# Altium PCB treehopper-micro.PcbDoc
Units mm, origin at the board's own origin, x right, y up, seen from the top; angles counter-clockwise.
Board outline 9.65 x 25.4 mm, 2 copper layers (Top Layer, Bottom Layer), stack 0.871 mm thick; 14 components, 21 nets, 79 pads, 34 vias.
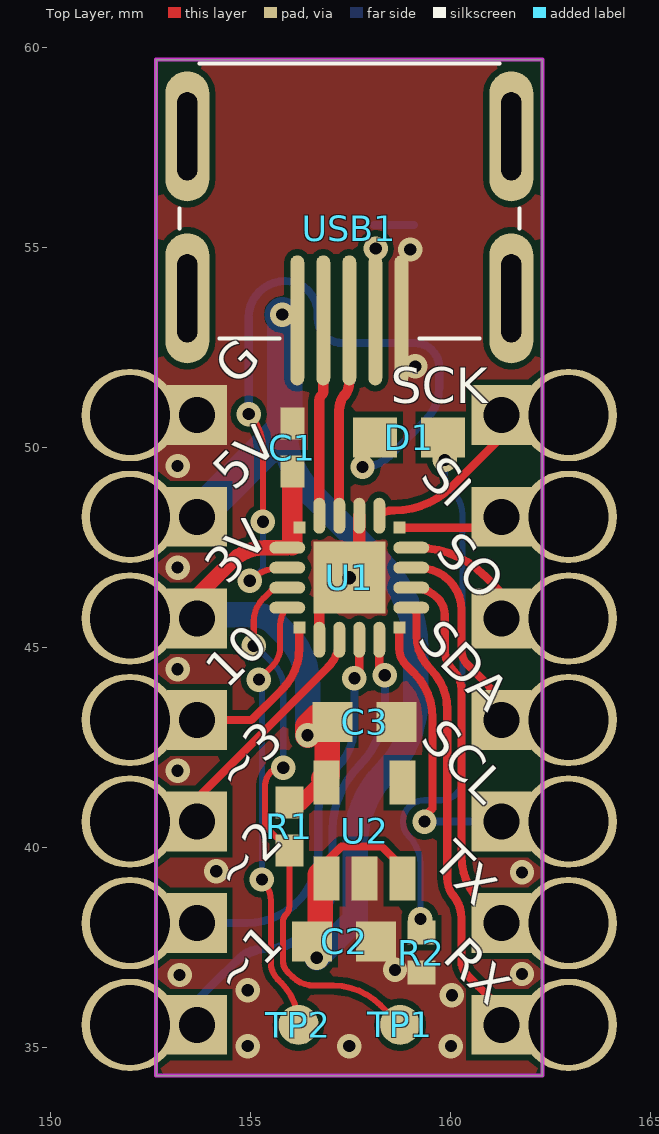
[diagram p0: Top Layer view]
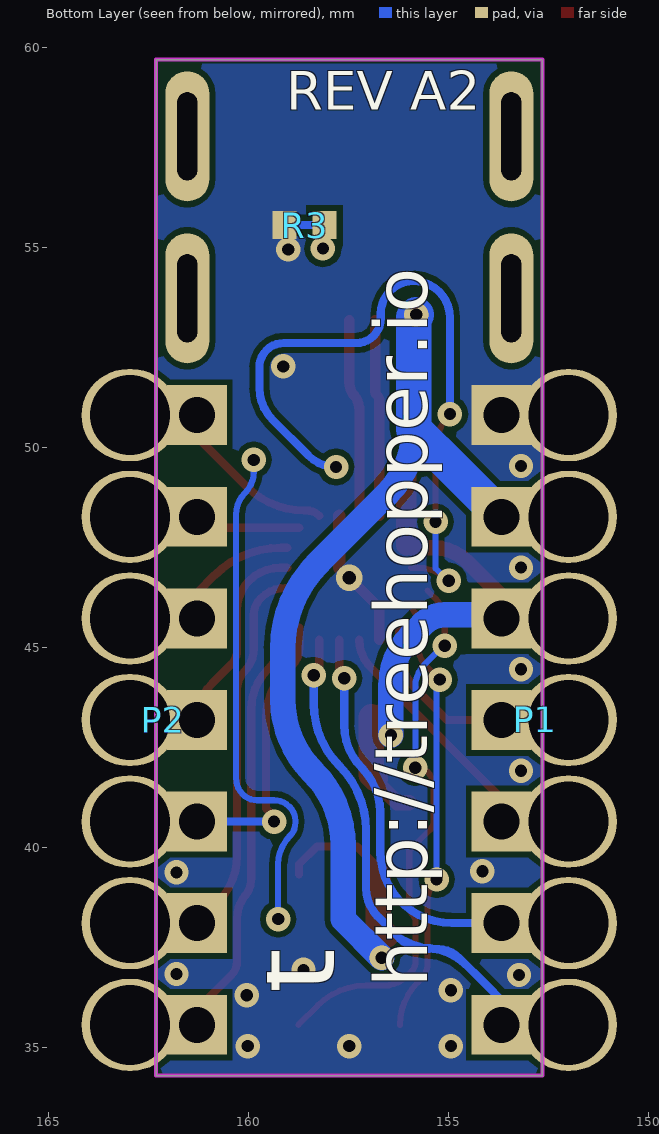
[diagram p1: Bottom Layer view, seen from below]
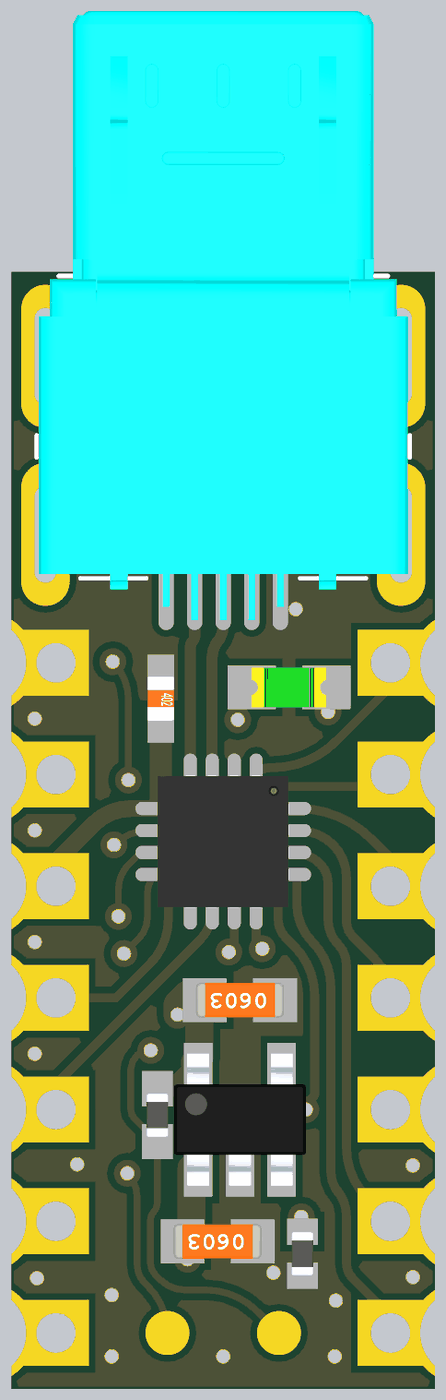
[diagram p2: 3D render of the assembled board from above, using the file's embedded part models]

## Layer stack, top to bottom
Top Solder: solder mask 0.0102, Solder Resist, Dk 3.5
Top Layer: signal copper 0.0356
Dielectric 1: dielectric 0.8, FR-4, Dk 4.8
Bottom Layer: signal copper 0.0356
Bottom Solder: solder mask 0.0102, Solder Resist, Dk 3.5

## Board outline
152.654,34.29 162.306,34.29 162.306,59.69 152.654,59.69

## Design rules (kind name [scope] priority, off if disabled: settings)
Clearance Clearance_1 [OnLayer('Keep-Out Layer')] p1: gap=0
Clearance [not OnLayer('Keepout')] p2: gap=0.152
ComponentClearance [All] p1: gap=0 collisioncheckmode=3 verticalgap=0 showdistances=FALSE
DiffPairsRouting [All] p1: maxlimit=0.254 minlimit=0.152 mostfreqgap=0.254 toplayer_minwidth=0.152 toplayer_maxwidth=0.381 toplayer_prefwidth=0.203 bottomlayer_minwidth=0.152 bottomlayer_maxwidth=0.381 bottomlayer_prefwidth=0.203 maxuncoupledlength=12.7
HoleSize [All] p1: absolutevalues=TRUE maxlimit=12.7 minlimit=0.305 maxpercent=80.000 minpercent=20.000
HoleToHoleClearance [All] p1: gap=0 allowstackedmicrovias=TRUE
MinimumSolderMaskSliver [All] p1: minsoldermaskwidth=0
PlaneConnect [All] p1: planeconnectstyle=Direct reliefexpansion=0.508 reliefentries=4 reliefconductorwidth=0.254 reliefairgap=0.254
PolygonConnect [All] p1: connectstyle=Direct reliefconductorwidth=0.254 reliefentries=4 polygonreliefangle="90 Angle" airgapwidth=0.254
RoutingVias [All] p1: holewidth=0.305 width=0.61 viastyle="Through Hole" minholewidth=0.305 minwidth=0.61 maxholewidth=0.711 maxwidth=1.27
SilkToSilkClearance [All] p1: silktosilkclearance=0
SilkToSolderMaskClearance [IsPad] p1: minsilkscreentomaskgap=0 clearancetoexposedcopper=TRUE
SolderMaskExpansion [All] p1: expansion=0
Width [All] p1: maxlimit=12.7 minlimit=0.152 preferedwidth=0.203
22 further rules are at their usual default settings.

## Classes and differential pairs
differential pair USB_D: +USB_D_P -USB_D_N

## Components (designator, comment, footprint, x,y, rotation, side; value= is the part's Value field where it differs from the comment)
C1 "100n" CAPC1005N 156.058,49.987 r270 top
C2 "4u7" CAPC1608N 157.353,37.643 r180 top
C3 "4u7" CAPC1608N 157.861,43.129 r180 top
D1 "GREEN" LTST-C190GKT_NO_SILK 158.979,50.241 r0 top
P1 "Header 7" HDR1X7_CASTELATED 153.67,35.56 r90 bottom
P2 "Header 7" HDR1X7_CASTELATED 161.29,50.8 r270 bottom
R1 "1k" RESC1005N#1 155.981,40.513 r90 top
R2 "1k" RESC1005N#2 159.283,37.363 r90 top
R3 "DNI" RESC1005N_TIE 158.598,55.55 r180 bottom net-tie
TP1 "TESTPOINT" TESTPOINT100 158.75,35.56 r0 top
TP2 "TESTPOINT" TESTPOINT100 156.21,35.56 r0 top
U1 "EFM8UB10F16G-B-QFN20" QFN50P300X300X90-20N-NO-SILK 157.48,46.736 r270 top
U2 "AP2112K-3.3" SOT23-5AN-no-silk 157.861,40.411 r90 top
USB1 "USB Micro B Receptacle" ZX60-B-5S(01) 157.48,53.721 r270 top

## Footprints (in the part's own frame and the unit in brackets; to place one, negate y for a bottom-side part, rotate by r counter-clockwise, add the part's x,y. Pads: shape width x height; smd on the part's side, far side on the other; paste and mask are expansions set on the pad)
CAPC1005N [mm] "Chip Capacitor (0402), Body 1.0x0.5mm, IPC Medium Density"
  rect 0.8x0.6 smd: 1(-0.6,0) 2(0.6,0)
  body extent -0.5,-0.3 0.5,0.3, height 0.2
CAPC1608N [mm] "Chip Capacitor (0603), Body 1.6x0.8mm, IPC Medium Density"
  rect 1x1 smd: 1(-0.8,0) 2(0.8,0)
  body extent -1,-0.39 1,0.39, height 0.79
HDR1X7_CASTELATED [mil] "Connector; Header; 7 Position"
  oval 90.55x95 hole 78.74: 1(0,-66) 2(100,-66) 3(200,-66) 4(300,-66) 5(400,-66) 6(500,-66) 7(600,-66)
  rect 59x59 hole 35.43: 1(0,0) 2(100,0) 3(200,0) 4(300,0) 5(400,0) 6(500,0) 7(600,0)
LTST-C190GKT_NO_SILK [mm] "Blue LED, 0603"
  rect 1.1x1 smd: 1(-0.85,0) 2(0.85,0)
  body extent -0.85,-0.45 0.85,0.45, height 0.9
QFN50P300X300X90-20N-NO-SILK [mm] "QFN, 16+4 Leads, Body 3.00x3.00mm, Pitch 0.50mm, IPC Medium Density"
  rect 0.3x0.3 smd: 1(-1.25,1.25) 6(-1.25,-1.25) 11(1.25,-1.25) 16(1.25,1.25)
  oval 0.9x0.3 smd: 2(-1.55,0.75) 3(-1.55,0.25) 4(-1.55,-0.25) 5(-1.55,-0.75) 12(1.55,-0.75) 13(1.55,-0.25) 14(1.55,0.25) 15(1.55,0.75)
  oval 0.3x0.9 smd: 7(-0.75,-1.55) 8(-0.25,-1.55) 9(0.25,-1.55) 10(0.75,-1.55) 17(0.75,1.55) 18(0.25,1.55) 19(-0.25,1.55) 20(-0.75,1.55)
  rect 1.8x1.8 smd mask+0: 21(0,0)
  body extent -1.5,-1.5 1.5,1.5, height 0.92
RESC1005N#1 [mm] "Chip Resistor, Body 1.1x0.5mm, IPC Medium Density"
  rect 0.8x0.7 smd: 1(-0.6,0) 2(0.6,0)
  body extent -0.5,-0.25 0.5,0.25, height 0.38
RESC1005N#2 [mm] "Chip Resistor, Body 1.1x0.5mm, IPC Medium Density"
  rect 0.6x0.7 smd: 1(-0.5,0) 2(0.5,0)
  body extent -0.5,-0.25 0.5,0.25, height 0.38
RESC1005N_TIE [mm] "Chip Resistor, Body 1.1x0.5mm, IPC Medium Density"
  rect 0.6x0.7 smd: 1(-0.5,0) 2(0.5,0)
  Top Layer lines w0.203: 0.5,0 -0.5,0
  body extent -0.5,-0.25 0.5,0.25, height 0.38
SOT23-5AN-no-silk [mm] "SOT23, 5-Leads, Body 2.9x1.6mm, Pitch 0.95mm, Lead Span 2.8mm, IPC Medium Density"
  rect 1.1x0.65 smd: 1(-1.2,0.95) 2(-1.2,0) 3(-1.2,-0.95) 4(1.2,-0.95) 5(1.2,0.95)
  body extent -1.5,-1.5 1.5,1.5, height 1.3
TESTPOINT100 [mm] "Testpoint, 1mm"
  round 1 smd paste-1: 1(0,0)
ZX60-B-5S(01) [mm]
  oval 3.25x0.35 smd: 1(0.55,-1.3) 2(0.55,-0.65) 3(0.55,0) 4(0.55,0.65) 5(0.55,1.3)
  oval 3.25x1.1 hole 0.5 slot 2.2 at 0 deg: MH1(0,4.05) MH2(0,-4.05) MH3(-4.05,-4.05) MH4(-4.05,4.05)
  silkscreen extent -5.87,-4.25 1,4.25, body extent -11.9,-4.2 1.95,4.2, height 4.4

## Part data
C1: library part "Cap Semi", "Capacitor (Semiconductor SIM Model)"
C2 C3: library part "Cap Semi", "CAP SEMI 4U7 10V 0603"
D1: library part LED_GREEN, "Typical greenGaAs LED"
P1 P2: "Header, 7-Pin"
R1 R2 R3: library part "Res Semi", "Semiconductor Resistor"
TP1 TP2: "Testpoint"
U1: "IC MCU 16KB 20QFN"
U2: "AP2112 IC REG LDO 3.3V 0.6A SOT25"

## Via types
v1: diameter 0.61, hole 0.305, Top Layer to Bottom Layer, tented both sides, 33 vias
v2: diameter 0.66, hole 0.33, Top Layer to Bottom Layer, tented both sides, 1 vias

## Nets (pads, with @x,y where several pads share a name; then routed paths per layer and width w, separated by ;. In a path a pad name is that pad's centre, name@x,y a point inside that pad or via, vN(x,y) a via of type N, cw(c..) or ccw(c..) an arc to the next point about the centre after c; other vN are vias at no path point)
3V3: C1.2 C3.2 P1.5 R1.2 U1.6 U1.7 U2.5 | length 13.9
  Top Layer w0.203: C3.2@156.667,43.256 C3.2@156.934,43.256
  Top Layer w0.381: P1.5@153.67,45.72 153.67,46.275 154.533,47.138 ; 154.533,47.138 cw(c155.372,46.299) 155.372,47.485 U1.7@155.929,47.485 ; U1.7@155.93,47.549 U1.7@156.058,47.549 ; R1.2 156.286,41.113 156.835,41.662 156.835,41.713 U2.5@156.886,41.713
  Top Layer w0.508: U1.7@156.058,47.549 C1.2
  Top Layer w0.635: v1(156.439,42.799) 156.439,43.028 C3.2@156.667,43.256 ; U2.5@156.835,41.713 156.934,41.812 C3.2@156.934,43.256
  Bottom Layer w0.635: P1.5@153.67,45.72 153.759,45.809 155.092,45.809 cw(c155.092,45.034) 155.64,45.582 ; 155.64,45.582 155.926,45.296 cw(c154.688,44.059) 156.439,44.059 v1(156.439,42.799)
5V: C2.2 P1.6 U2.1 U2.3 USB1.1 | length 25.5
  Top Layer w0.203: U2.1@156.835,39.313 156.835,39.563 157.287,40.015 158.291,40.015 158.735,39.572 U2.3@158.735,39.313
  Top Layer w0.635: C2.2@156.553,37.795 156.759,38.001 U2.1@156.759,39.313
  Bottom Layer w0.635: 155.867,50.452 ccw(c158.185,50.452) 156.546,48.813 158.258,47.101 ; v1(156.667,37.236) 157.632,38.202 157.632,40.045 cw(c160.234,40.045) 158.394,41.884 ccw(c156.585,43.694) 159.144,43.694 159.144,44.963 ccw(c156.121,44.963) 158.259,47.1
  Bottom Layer w0.889: P1.6@153.67,48.26 155.334,49.924 155.339,49.924 155.867,50.452 155.867,53.251 v1(155.804,53.315)
C2CK: R1.1 TP1.1 U1.9 | length 13.8
  Top Layer w0.152: v1(155.092,45.034) 155.092,45.639 cw(c155.926,45.639) 155.337,46.228 U1.9@155.524,46.416 ; v1(155.829,41.986) 155.769,41.986 ccw(c155.769,41.639) 155.524,41.885 ccw(c155.892,41.517) 155.376,41.581 ccw(c155.892,41.517) 155.372,41.517 155.372,40.649 ccw(c155.678,40.649) 155.461,40.433 R1.1 155.981,38.524 cw(c155.67,38.524) 155.89,38.303 ccw(c156.049,38.145) 155.824,38.145 155.824,37.145 ccw(c156.187,37.145) 155.93,36.889 156.052,36.767 ccw(c156.603,37.317) 156.603,36.539 157.079,36.539 cw(c157.079,34.868) 158.26,36.05 ; 158.261,36.049 TP1.1
  Bottom Layer w0.152: v1(155.092,45.034) 155.128,45.034 155.606,44.556 cw(c155.069,44.018) 155.829,44.018 v1(155.829,41.986)
C2D: TP2.1 U1.10 | length 11
  Top Layer w0.152: v1(155.219,44.188) 155.55,44.519 ccw(c155.06,45.009) 155.753,45.009 155.753,45.558 cw(c156.358,45.558) U1.10 ; v1(155.296,39.192) cw(c154.755,38.651) 155.52,38.651 155.52,37.109 ccw(c156.101,37.109) 155.69,36.698 155.773,36.615 ; 155.774,36.614 cw(c154.718,35.56) TP2.1
  Bottom Layer w0.152: v1(155.219,44.188) 155.296,44.112 v1(155.296,39.192)
GND: C1.1 C2.1 C3.1 P1.7 R2.1 R3.1 U1.3 U1.12 U1.21 U2.2 USB1.5 | length 3.5
  Top Layer w0.254: U1.12 156.73,45.986 U1.21@157.607,46.863
  Top Layer w0.305: U1.21@157.607,46.863 157.73,46.986 U1.3
  other v1: 154.94,35.027 157.48,35.027 160.02,35.027 160.045,36.297 154.94,36.424 153.238,36.805 161.798,36.83 158.623,36.932 161.798,39.37 154.153,39.395 153.187,41.91 153.187,44.45 153.187,46.99 153.187,49.53 159.131,52.019 159.004,54.94
  other v2: 157.48,46.736
ID: R3.2 USB1.4
  other v1: 158.14,54.966
LED: D1.1 U1.8 | length 17.9
  Top Layer w0.152: v1(154.965,50.825) cw(c154.107,49.967) 155.321,49.967 v1(155.321,48.133) ; v1(154.991,46.66) cw(c155.778,45.872) 155.778,46.986 U1.8
  Bottom Layer w0.152: v1@154.989,46.634 v1@154.991,46.637 ; v1(154.991,46.66) v1@154.991,46.637 ; v1(155.321,48.133) 155.321,46.967 v1@154.991,46.637
  Bottom Layer w0.203: v1(154.965,50.825) 154.965,53.242 cw(c155.876,53.242) 155.231,53.885 ; 155.233,53.887 cw(c155.876,53.242) 155.876,54.153 cw(c155.876,53.336) 156.693,53.336 156.693,53.213 ccw(c157.302,53.213) 157.302,52.603 159.118,52.603 cw(c159.118,51.994) 159.728,51.994 159.728,51.483 cw(c158.601,51.483) 159.398,50.686 158.504,49.792 cw(c157.81,50.486) v1(157.81,49.505)
MISO: P2.2 U1.1 | length 2.7
  Top Layer w0.203: U1.1 161.016,47.986 P2.2@161.29,48.26
MOSI: P2.3 U1.20 | length 3.3
  Top Layer w0.203: U1.20 159.188,47.486 cw(c159.188,45.142) 160.845,46.799 161.29,46.355 P2.3@161.29,45.72
NetD1_2: D1.2 R2.2 | length 12.7
  Bottom Layer w0.152: 158.961,40.284 cw(c159.286,40.609) 158.826,40.609 158.826,40.665 cw(c159.298,40.665) 158.964,40.999 158.983,41.017 cw(c159.36,40.64) 159.36,41.173 159.789,41.173 ccw(c159.789,41.671) 160.14,41.319 ccw(c159.727,41.732) 160.311,41.732 160.311,48.315 ccw(c159.554,48.315) 160.089,48.851 cw(c160.625,49.387) 159.868,49.387 v1(159.868,49.682) ; 158.961,40.284 cw(c158.244,39.567) 159.258,39.567 v1(159.258,38.202)
P1.2: P1.4 U1.11 | length 4.1
  Top Layer w0.203: P1.4@153.67,43.18 155.037,43.18 155.804,43.946 ccw(c154.774,44.976) 156.23,44.976 U1.11
PWM1: P1.1 U1.15 | length 14.5
  Top Layer w0.203: U1.15 158.23,44.437 v1(158.369,44.298)
  Bottom Layer w0.203: P1.1@153.67,35.56 153.67,36.17 154.051,36.551 ; v1(158.369,44.298) 158.369,43.582 cw(c156.184,43.582) 157.73,42.038 cw(c156.184,43.582) 157.729,42.037 ccw(c159.342,40.424) 157.061,40.424 157.061,38.979 cw(c156.05,38.979) 156.765,38.264 156.243,37.742 ; 154.051,36.551 154.731,37.231 cw(c155.252,36.71) 155.252,37.446 ccw(c155.252,39.256) 155.274,37.447 ; 154.051,36.551 154.519,37.019 cw(c155.669,35.869) 155.274,37.447 ; 155.274,37.447 ccw(c155.252,39.256) 155.484,37.461 ccw(c155.252,39.256) 155.669,37.495 ; 155.274,37.447 cw(c155.669,35.869) 155.669,37.495 ; 155.669,37.495 ccw(c155.669,38.284) 156.227,37.726 156.243,37.742 ; 155.669,37.495 ccw(c155.252,39.256) 155.791,37.529 ccw(c155.252,39.256) 156.243,37.742
PWM2: P1.2 U1.14 | length 9.6
  Top Layer w0.203: v1(157.607,44.221) 157.73,44.344 U1.14
  Bottom Layer w0.203: P1.2@153.67,38.1 154.915,38.1 ccw(c154.915,39.891) 156.705,39.891 156.705,40.879 cw(c158.245,40.879) 157.156,41.967 ccw(c156.068,43.056) 157.607,43.056 v1(157.607,44.221)
PWM3: P1.3 U1.13 | length 6
  Top Layer w0.203: P1.3@153.67,40.64 153.67,41.22 156.943,44.493 ccw(c156.251,45.186) 157.079,44.664 ccw(c156.251,45.186) 157.134,44.763 ccw(c156.251,45.186) U1.13
RX: P2.7 U1.17 | length 11.4
  Top Layer w0.203: U1.17 U1.17@159.156,45.86 ; U1.17@159.156,45.999 U1.17@159.156,45.86 ; P2.7@161.29,35.56 ccw(c160.37,35.56) 161.021,36.21 160.426,36.805 cw(c160.765,37.144) 160.286,37.144 160.286,38.22 ccw(c159.378,38.22) 160.144,38.708 ; U1.17@159.156,45.86 159.156,45.308 ccw(c160.37,45.308) 159.512,44.45 cw(c158.502,43.44) 159.93,43.44 159.93,39.223 ccw(c160.659,39.223) 160.035,38.846 ; 160.035,38.846 cw(c159.378,38.22) 160.144,38.708 ; 160.035,38.846 ccw(c160.659,39.223) 160.144,38.708
SCK: P2.1 U1.2 | length 4.3
  Top Layer w0.203: U1.2 cw(c158.542,47.974) 158.542,48.415 158.598,48.415 ccw(c158.598,50.468) 160.049,49.017 161.29,50.257 P2.1@161.29,50.8
SCL: P2.5 U1.16 | length 7.1
  Top Layer w0.203: U1.16 158.73,44.968 ccw(c159.319,44.968) 158.902,44.552 159.096,44.358 cw(c157.968,43.231) 159.563,43.231 159.563,40.969 159.36,40.765 v1(159.36,40.64)
  Bottom Layer w0.203: v1(159.36,40.64) P2.5@161.29,40.64
SDA: P2.4 U1.19 | length 4.9
  Top Layer w0.203: U1.19 159.198,46.986 cw(c159.198,45.872) 159.985,46.66 cw(c159.259,45.933) 160.286,45.933 160.286,44.916 ccw(c160.765,44.916) 160.289,44.862 ccw(c160.765,44.916) 160.426,44.577 160.913,44.091 cw(c160.002,43.18) P2.4@161.29,43.18
TX: P2.6 U1.18 | length 9.3
  Top Layer w0.203: U1.18@159.08,46.482 cw(c159.08,45.624) 159.687,46.231 159.69,46.228 cw(c159.261,45.799) 159.868,45.799 159.868,44.951 ccw(c160.648,44.951) 159.937,44.63 ccw(c160.648,44.951) 160.096,44.399 cw(c159.638,43.941) 160.286,43.941 160.286,39.785 ccw(c161.93,39.785) 160.767,38.623 P2.6@161.29,38.1
USB_D_N: U1.5 USB1.2 | length 4.9
  Top Layer w0.254: U1.5 156.73,51.162 cw(c156.925,51.162) 156.787,51.299 ccw(c156.683,51.403) 156.826,51.368 ccw(c156.683,51.403) 156.83,51.403 USB1.2
USB_D_P: U1.4 USB1.3 | length 5.1
  Top Layer w0: U1.4@157.226,48.29 U1.4
  Top Layer w0.254: U1.4@157.226,48.29 157.226,50.917 cw(c157.851,50.917) 157.315,51.239 ; USB1.3 157.48,51.636 cw(c156.918,51.636) 157.409,51.363 cw(c156.918,51.636) 157.403,51.353 ; 157.315,51.239 cw(c157.851,50.917) 157.403,51.353 ; 157.315,51.239 ccw(c156.918,51.636) 157.403,51.353
pads on no net: U2.4 USB1.MH1 USB1.MH2 USB1.MH3 USB1.MH4

## Polygon pours and split planes (outlines as drawn)
GND on Top Layer "BottomGnd" (solid, remove dead copper, pour order 8): 152.654,59.588 162.306,59.588 162.306,34.29 152.654,34.29
GND on Bottom Layer "BottomGnd" (solid, remove dead copper, pour order 9): 152.654,59.588 162.306,59.588 162.306,34.29 152.654,34.29

## Keep-outs
Keep-Out Layer:
  the board outline again, w0.1

## Silkscreen, mask and mechanical layers (free items; w line width, h text height)
Top Overlay:
  text "G" at 154.864,51.283 h1.52 r45
  text "SCK" at 158.521,50.8 h1.52
  text "SI" at 159.004,49.022 h1.52 r315
  text "5V" at 154.813,48.666 h1.52 r45
  text "SO" at 159.385,47.117 h1.52 r315
  text "3V" at 154.661,46.304 h1.52 r48
  text "SDA" at 158.928,44.933 h1.52 r315
  text "10" at 154.635,43.713 h1.52 r45
  text "SCL" at 159.004,42.443 h1.52 r315
  text "~3" at 154.838,41.123 h1.52 r45
  text "TX" at 159.309,39.395 h1.52 r315
  text "~2" at 154.813,38.633 h1.52 r45
  text "RX" at 159.563,36.982 h1.52 r315
  text "~1" at 154.813,36.043 h1.52 r45
Bottom Overlay:
  text "REV A2" at 159.055,58.115 h1.65
  text "http://treehopper.io" at 155.092,36.5 h2.29 r270
  text "t" at 157.175,36.347 h3.56 r270